# Altium PCB V2.1.PcbDoc (part 1 of 3)
Units mil, origin at the board's own origin, x right, y up, seen from the top; angles counter-clockwise.
Board outline 6653.54 x 3031.5 mil, 4 copper layers (Top Layer, 地, 电源, Bottom Layer); 355 components, 238 nets, 1139 pads, 340 vias.
Unrouted connection lines stored in the file: 1.
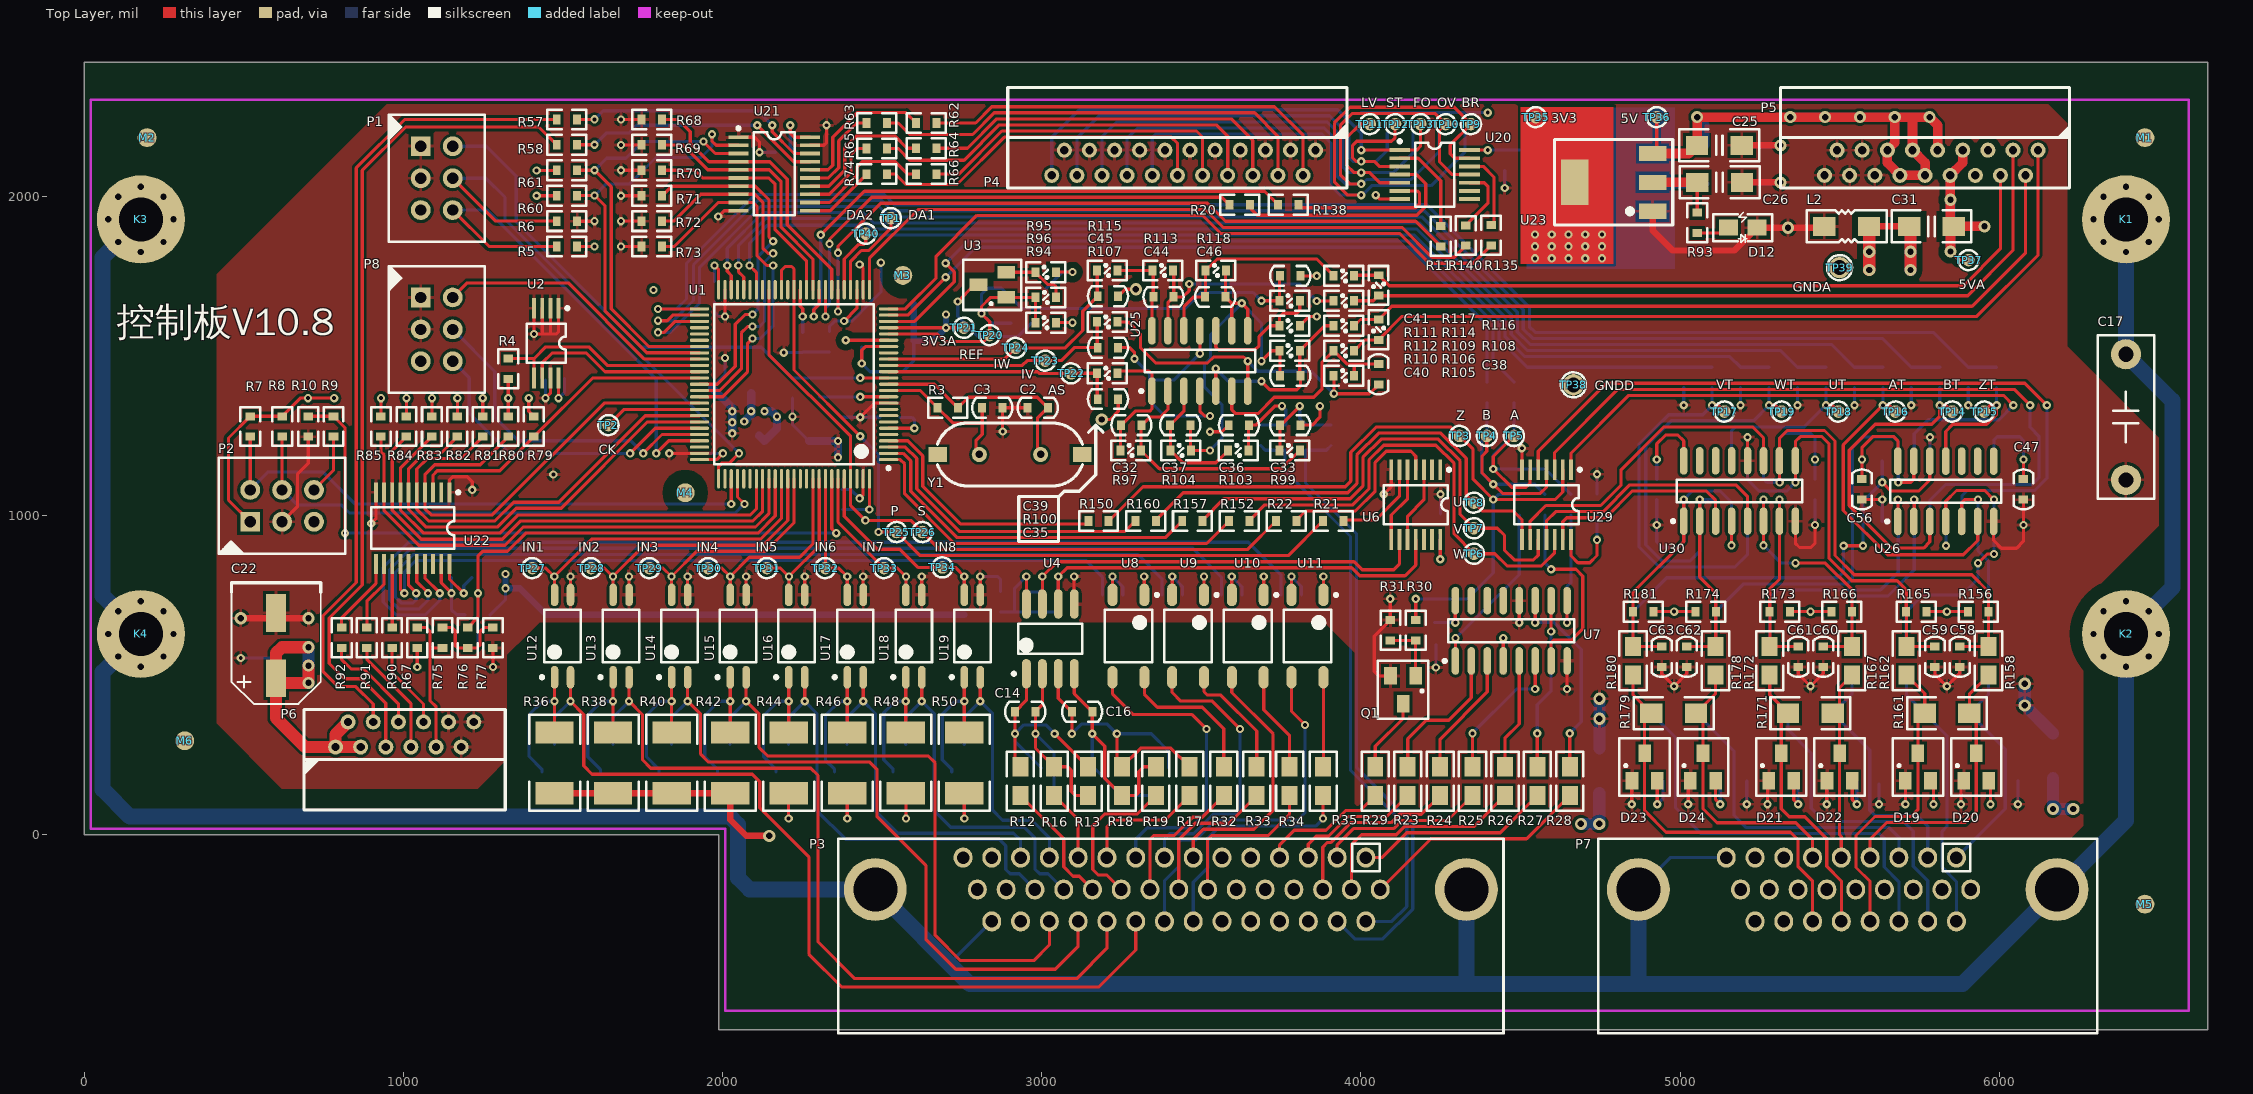
[diagram p0: Top Layer view]
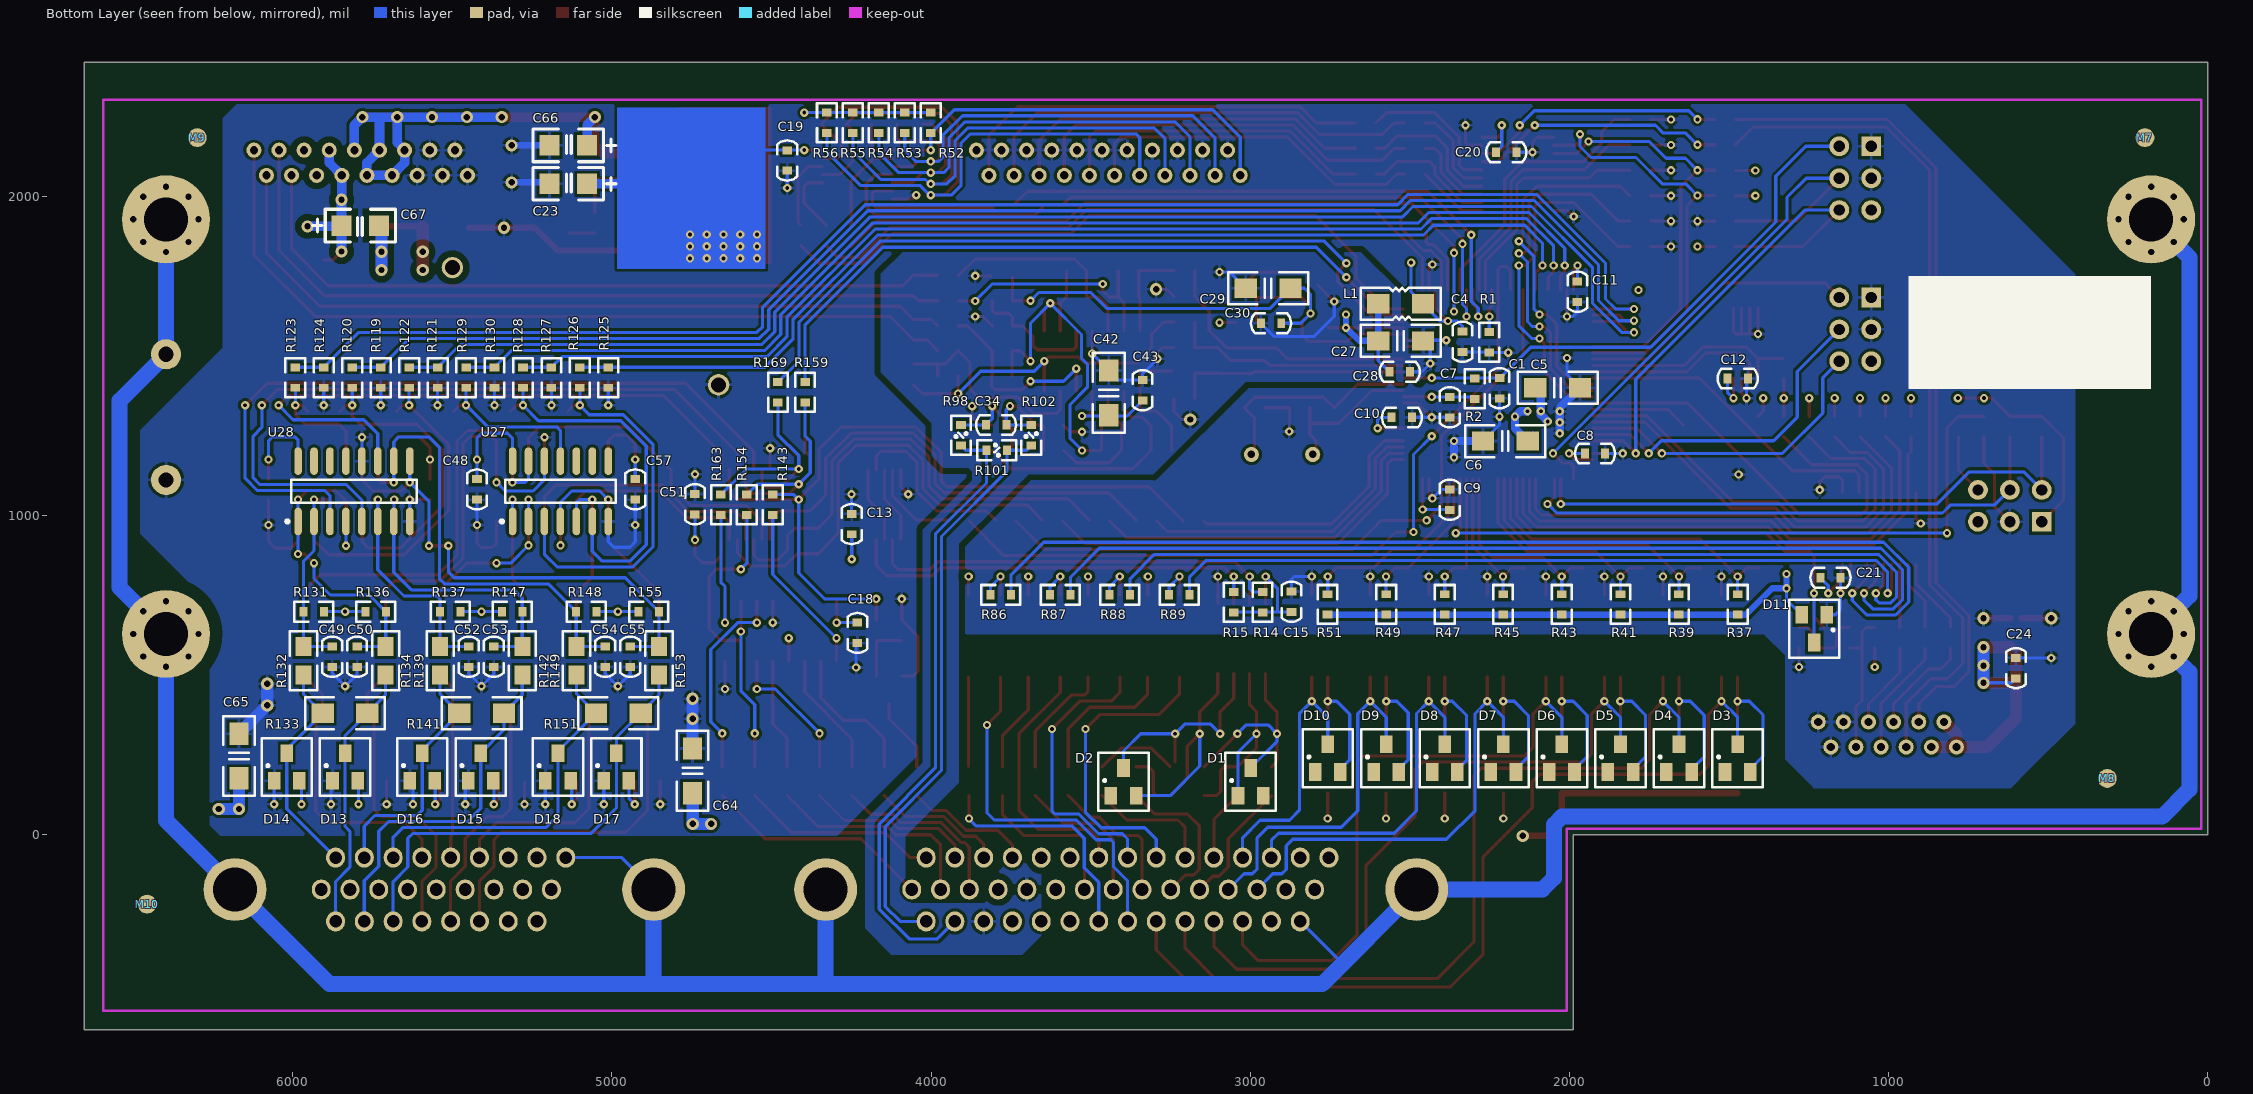
[diagram p1: Bottom Layer view, seen from below]
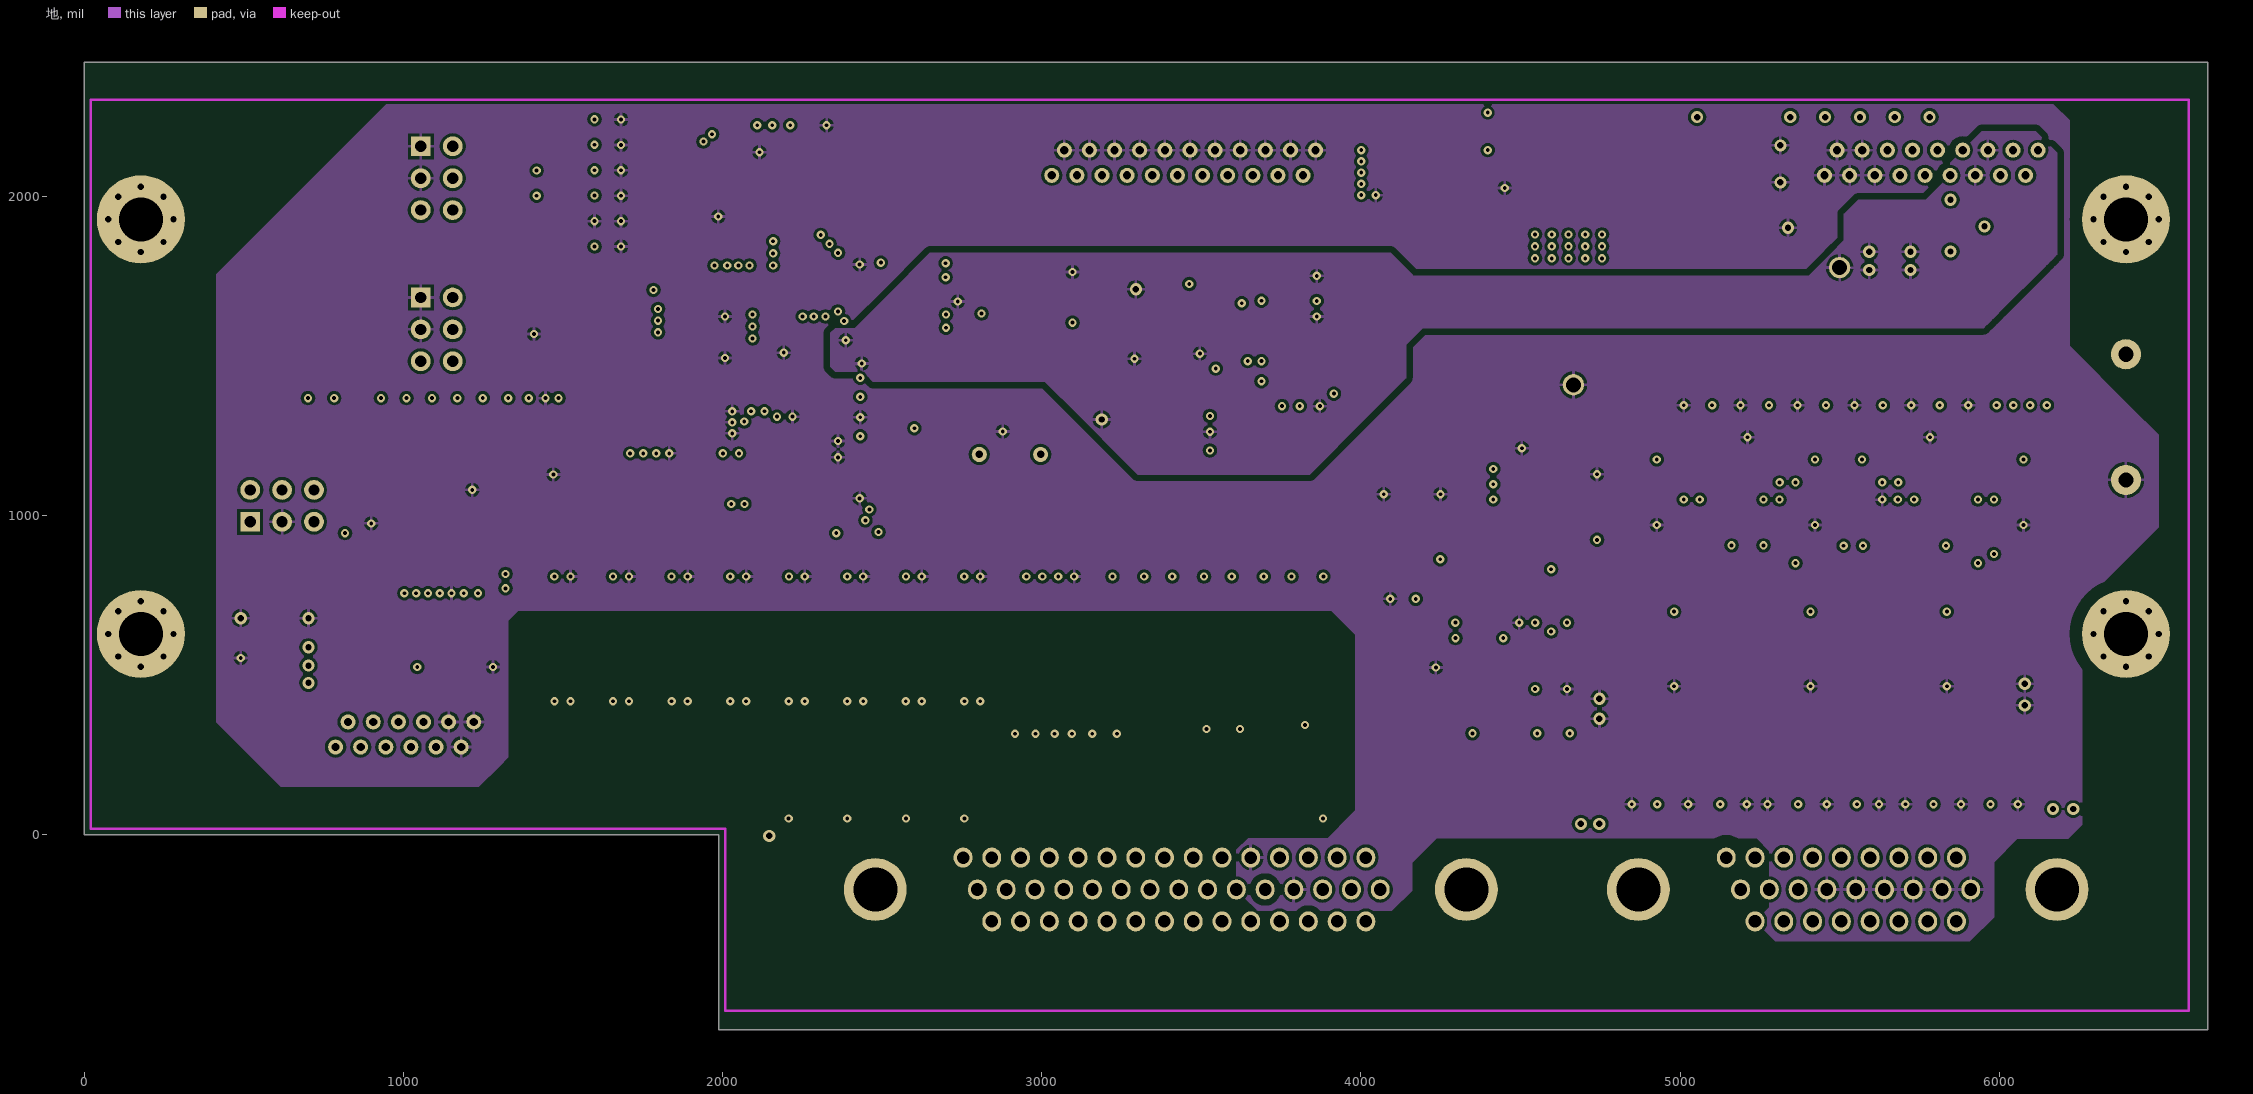
[diagram p2: 地]
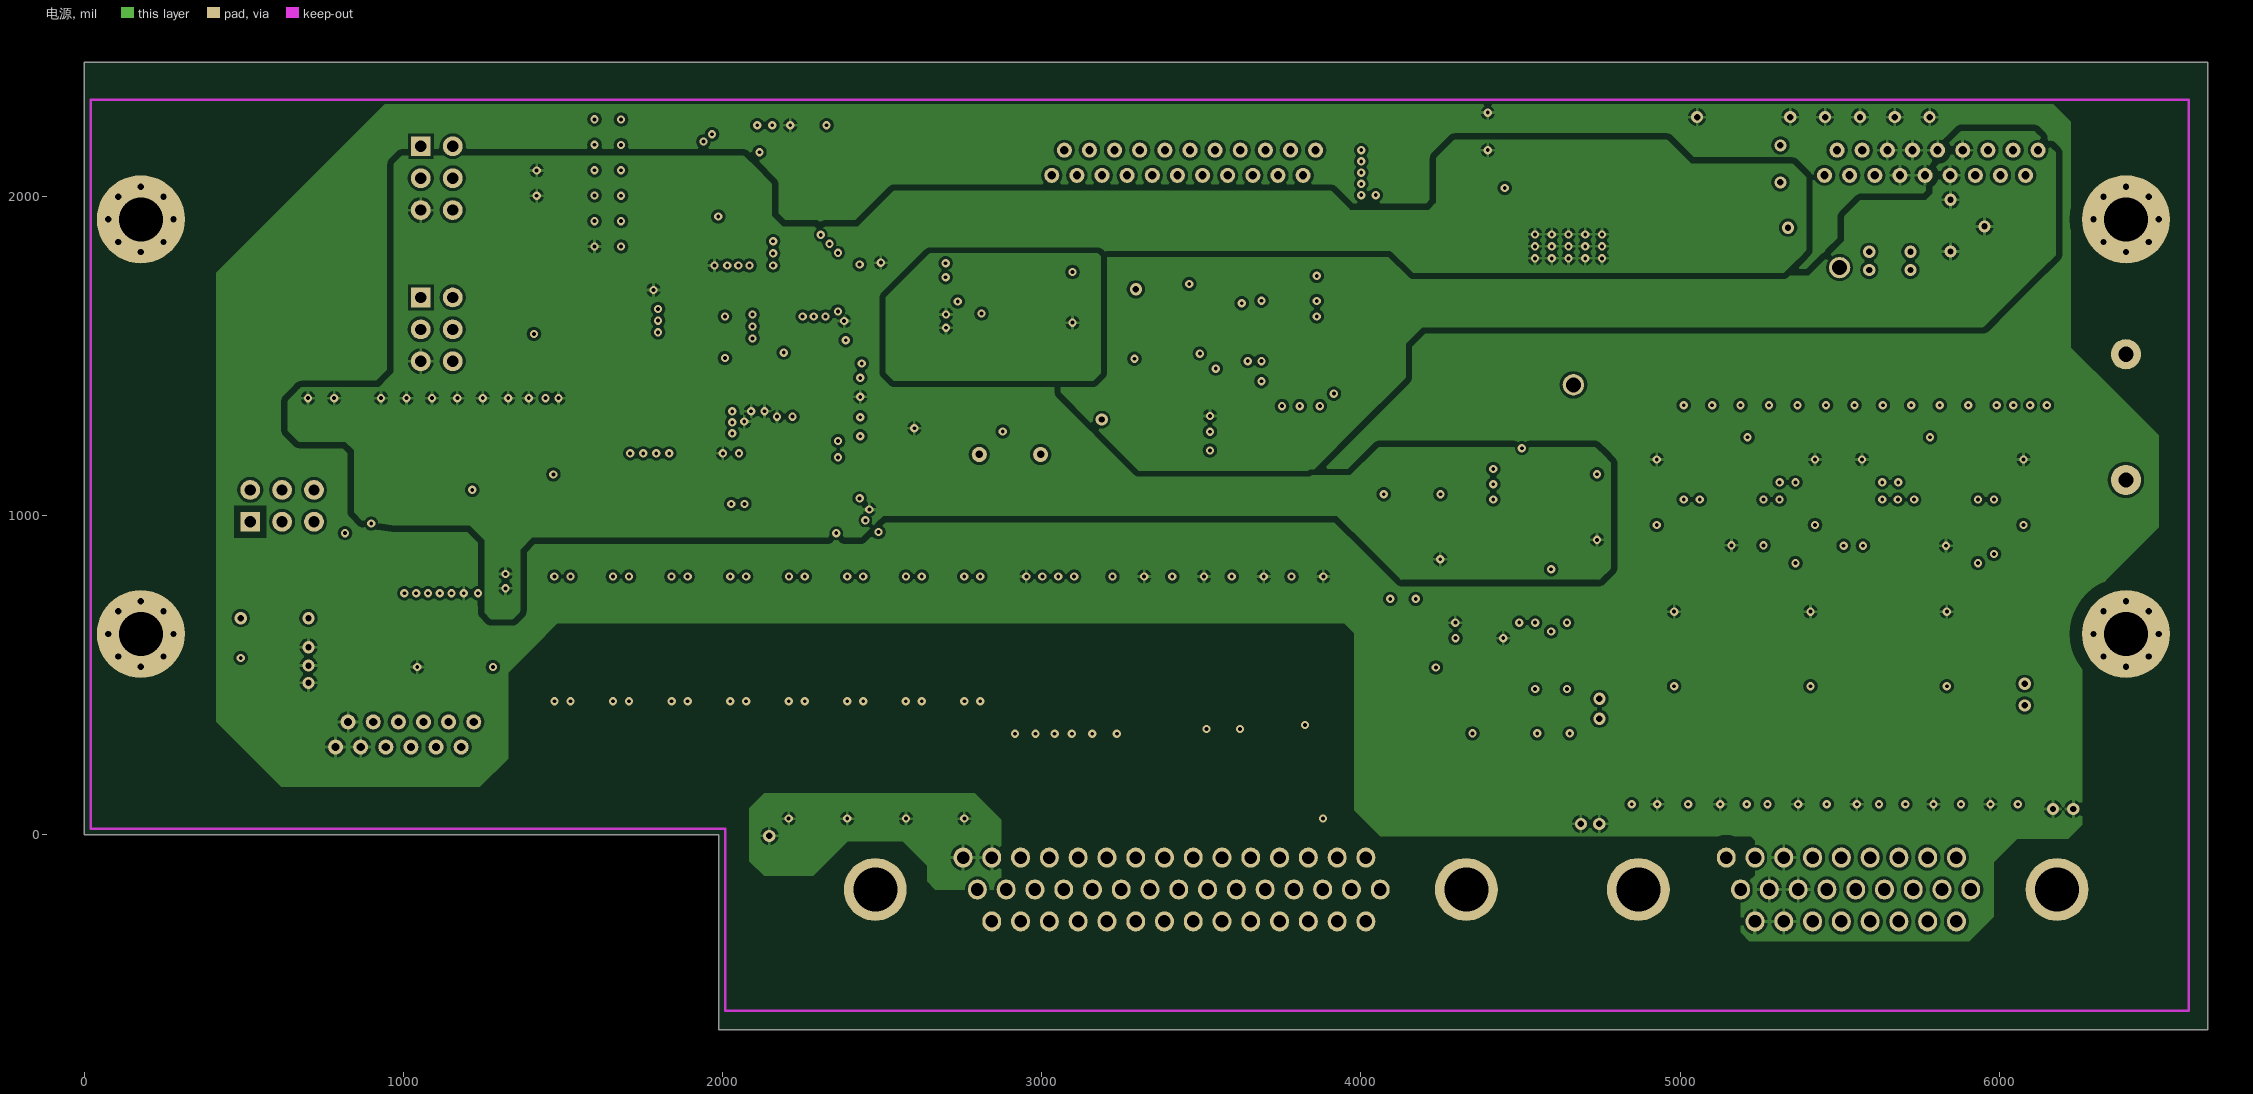
[diagram p3: 电源]

## Layer stack, top to bottom
Top Layer: signal copper 1.4
Dielectric: core 12.6, FR-4, Dk 4.8
地: signal copper 1.4
Dielectric: prepreg 12.6, FR-4, Dk 4.8
电源: signal copper 1.4
Dielectric: core 12.6, FR-4, Dk 4.8
Bottom Layer: signal copper 1.4

## Board outline
0,0 0,2421.26 6653.54,2421.26 6653.54,-610.24 1988.19,-610.24 1988.19,0 0,0

## Design rules (kind name [scope] priority, off if disabled: settings)
Clearance 5VA_5V [InNet('5VA') vs InNet('5V')] p1: gap=19.68
Clearance GNDA_GP [InNet('GNDA') vs InNet('GP')] p2: gap=19.68
Clearance 5VA_GP [InNet('5VA') vs InNet('GP')] p3: gap=19.68
Clearance 5V_3V3A [InNet('5V') vs InNet('3V3A')] p4: gap=19.68
Clearance 5VA_3V3 [InNet('5VA') vs InNet('3V3')] p5: gap=19.68
Clearance 5VA_GNDD [InNet('5VA') vs InNet('GNDD')] p6: gap=19.68
Clearance 5VA_3V3A [InNet('5VA') vs InNet('3V3A')] p7: gap=19.68
Clearance 5V_GNDA [InNet('5V') vs InNet('GNDA')] p8: gap=19.68
Clearance 5V_3V3 [InNet('5V') vs InNet('3V3')] p9: gap=19.68
Clearance 5V_5VA [InNet('5V') vs InNet('5VA')] p10: gap=19.68
Clearance 3V3_3V3A [InNet('3V3') vs InNet('3V3A')] p11: gap=19.68
Clearance 5V_GP [InNet('5V') vs InNet('GP')] p12: gap=39.37
Clearance GNDD_GNDA [InNet('GNDD') vs InNet('GNDA')] p13: gap=19.68
Clearance GNDD_GP [InNet('GNDD') vs InNet('GP')] p14: gap=39.37
Clearance COM+ [InNet('COM+') vs InNet('GP')] p15: gap=39.37
Clearance [All] p16: gap=9
ComponentClearance [All] p1: gap=7.87 collisioncheckmode=3 verticalgap=7.87 showdistances=FALSE
HoleSize [All] p1: absolutevalues=TRUE maxlimit=10000 minlimit=1 maxpercent=80.000 minpercent=20.000
MinimumSolderMaskSliver [All] p1 off: minsoldermaskwidth=10
PolygonConnect [All] p1: connectstyle=Relief reliefconductorwidth=10 reliefentries=4 polygonreliefangle="90 Angle"
RoutingLayers [All] p1: top layer_v5=TRUE mid layer 1_v5=FALSE mid layer 2_v5=FALSE bottom layer_v5=TRUE
RoutingVias [All] p1: holewidth=39.37 width=39.37 viastyle="Through Hole" minholewidth=0.04 minwidth=0.04 maxholewidth=39370.08 maxwidth=39370.08
SilkToSilkClearance [All] p1 off: silktosilkclearance=10
SilkscreenOverComponentPads [All] p1 off: minsilkscreentomaskgap=10
SolderMaskExpansion [All] p1: expansion=4
Width [All] p1: maxlimit=1000 minlimit=10 preferedwidth=10
22 further rules are at their usual default settings.

## Classes and differential pairs
component class 接口: C19 C20 C21 C22 C24 D11 P4 P5 P6 R11 R20 R52 R53 R54 R55 R56 R57 R58 R60 R61 R62 R63 R64 R65 R66 R67 R68 R69 R70 R71 R72 R73 R74 R75 R76 R77 R79 R80 R81 R82 R83 R84 R85 R86 R87 R88 R89 R90 R91 R92 R135 R138 R140 TP9 TP10 TP11 TP12 TP13 U20 U21 U22
component class 调理电路: C32 C33 C34 C35 C36 C37 C38 C39 C40 C41 C42 C43 C44 C45 C46 R97 R98 R99 R100 R101 R102 R103 R104 R105 R106 R107 R108 R109 R110 R111 R112 R113 R114 R115 R116 R117 R118 TP22 TP23 TP24 U25
component class 电源: C17 C23 C25 C26 C27 C28 C29 C30 C31 C66 C67 D12 K1 K2 K3 K4 L1 L2 M1 M2 M3 M4 M5 M6 M7 M8 M9 M10 R93 R94 R95 R96 TP20 TP21 TP35 TP36 TP37 TP38 TP39 U3 U23
component class MCU: C1 C2 C3 C4 C5 C6 C7 C8 C9 C10 C11 C12 P1 P2 P8 R1 R2 R3 R4 R5 R6 R7 R8 R9 R10 TP1 TP2 TP40 U1 U2 Y1
component class 指令: C13 C14 C15 C16 C18 D1 D2 D3 D4 D5 D6 D7 D8 D9 D10 P3 Q1 R12 R13 R14 R15 R16 R17 R18 R19 R21 R22 R23 R24 R25 R26 R27 R28 R29 R30 R31 R32 R33 R34 R35 R36 R37 R38 R39 R40 R41 R42 R43 R44 R45 R46 R47 R48 R49 R50 R51 TP25 TP26 TP27 TP28 TP29 TP30 TP31 TP32 TP33 TP34 U4 U6 U7 U8 U9 U10 U11 U12 U13 U14 U15 U16 U17 U18 U19
component class 编码器: C47 C48 C49 C50 C51 C52 C53 C54 C55 C56 C57 C58 C59 C60 C61 C62 C63 C64 C65 D13 D14 D15 D16 D17 D18 D19 D20 D21 D22 D23 D24 P7 R119 R120 R121 R122 R123 R124 R125 R126 R127 R128 R129 R130 R131 R132 R133 R134 R136 R137 R139 R141 R142 R143 R147 R148 R149 R150 R151 R152 R153 R154 R155 R156 R157 R158 R159 R160 R161 R162 R163 R165 R166 R167 R169 R171 R172 R173 R174 R178 R179 R180 R181 TP3 TP4 TP5 TP6 TP7 TP8 TP14 TP15 TP16 TP17 TP18 TP19 U26 U27 U28 U29 U30

## Components (designator, comment, footprint, x,y, rotation, side; value= is the part's Value field where it differs from the comment)
C1 "0.1uF" "C SMD 0603" 2219,1432.16 r270 bottom
C2 "10pF" "C SMD 0603" 3019.5,1338.81 r180 top
C3 "10pF" "C SMD 0603" 2813.42,1338.81 r0 top
C4 "0.1uF" "C SMD 0603" 2335,1513.16 r90 bottom
C5 "10uF" "C SMD 1206" 2107,1401.31 r180 bottom
C6 "10uF" "C SMD 1206" 2131,1234.31 r0 bottom
C7 "0.1uF" "C SMD 0603" 2375,1372.31 r270 bottom
C8 "0.1uF" "C SMD 0603" 1952,1195.31 r180 bottom
C9 "0.1uF" "C SMD 0603" 2375,1018.31 r90 bottom
C10 "0.1uF" "C SMD 0603" 2557,1308.31 r180 bottom
C11 "0.1uF" "C SMD 0603" 1975,1734.31 r270 bottom
C12 "0.1uF" "C SMD 0603" 1505,1430.31 r180 bottom
C13 "0.1uF" "C SMD 0603" 4249,942.31 r90 bottom
C14 "10pF" "C SMD 0603" 2980.59,386.39 r180 top
C15 "0.1uF" "C SMD 0603" 2871,763.16 r270 bottom
C16 "10pF" "C SMD 0603" 3158.59,386.39 r180 top
C17 "0.1uF 安规" "安规电容 10mm间距" 6397,1506.31 r270 top
C18 "0.1uF" "C SMD 0603" 4231,665.23 r270 bottom
C19 "0.1uF" "C SMD 0603" 4451,2145.31 r270 bottom
C20 "0.1uF" "C SMD 0603" 2230,2139.31 r180 bottom
C21 "0.1uF" "C SMD 0603" 1214,806.31 r180 bottom
C22 "100uF 16V ALC" D6.3ALC 601.09,490.89 r180 top
C23 "10uF 16V TAC" 3216TAC 5077.74,2040.31 r0 bottom
C24 "0.1uF" "C SMD 0603" 601.09,490.89 r90 bottom
C25 "10uF" "C SMD 1206" 5193.09,2160.89 r180 top
C26 "10uF" "C SMD 1206" 5194.09,2044.89 r180 top
C27 "10uF" "C SMD 1206" 2459,1548.31 r0 bottom
C28 "0.01uF" "C SMD 0603" 2500,1451.31 r0 bottom
C29 "10uF" "C SMD 1206" 3014,1713.31 r180 bottom
C30 "0.01uF" "C SMD 0603" 2967,1603.31 r180 bottom
C31 "10uF" "C SMD 1206" 5718,1906.83 r0 top
C32 "1nF" "C SMD 0603" 3313,1284.31 r180 top
C33 "1nF" "C SMD 0603" 3810.5,1284.31 r180 top
C34 "1nF" "C SMD 0603" 3828.5,1284.81 r180 bottom
C35 "1nF" "C SMD 0603" 3239.57,1365.93 r180 top
C36 "1nF" "C SMD 0603" 3586.05,1284.31 r0 top
C37 "1nF" "C SMD 0603" 3466.02,1284.31 r180 top
C38 "1nF" "C SMD 0603" 4055.5,1475.31 r270 top
C39 "1nF" "C SMD 0603" 3239.57,1527.08 r180 top
C40 "1nF" "C SMD 0603" 3746.5,1439.2 r0 top
C41 "0.1uF" "C SMD 0603" 3810.5,1751.81 r180 top
C42 "10uF" "C SMD 1206" 3443.5,1455.31 r270 bottom
C43 "0.1uF" "C SMD 0603" 3337.5,1425.31 r270 bottom
C44 "1nF" "C SMD 0603" 3413.57,1685.93 r180 top
C45 "1nF" "C SMD 0603" 3239.57,1688.24 r180 top
C46 "1nF" "C SMD 0603" 3575.57,1685.93 r180 top
C47 "0.1uF" "C SMD 0603" 6076,1114.81 r270 top
C48 "0.1uF" "C SMD 0603" 5423,1114.81 r270 bottom
C49 "1nF" "C SMD 0603" 5876.59,526.23 r90 bottom
C50 "1nF" "C SMD 0603" 5798.59,590.23 r270 bottom
C51 "0.1uF" "C SMD 0603" 4740,1004.31 r90 bottom
C52 "1nF" "C SMD 0603" 5448.59,526.23 r90 bottom
C53 "1nF" "C SMD 0603" 5370.59,590.23 r270 bottom
C54 "1nF" "C SMD 0603" 5021.09,526.23 r90 bottom
C55 "1nF" "C SMD 0603" 4942.59,590.23 r270 bottom
C56 "0.1uF" "C SMD 0603" 5570,1114.81 r270 top
C57 "0.1uF" "C SMD 0603" 4927,1114.81 r270 bottom
C58 "1nF" "C SMD 0603" 5876.59,526.23 r90 top
C59 "1nF" "C SMD 0603" 5798.59,590.23 r270 top
C60 "1nF" "C SMD 0603" 5448.59,526.23 r90 top
C61 "1nF" "C SMD 0603" 5370.59,590.23 r270 top
C62 "1nF" "C SMD 0603" 5021.09,526.23 r90 top
C63 "1nF" "C SMD 0603" 4942.59,590.23 r270 top
C64 "10uF" "C SMD 1206" 4747.59,131.15 r90 bottom
C65 "10uF" "C SMD 1206" 6168.59,177.65 r90 bottom
C66 "10uF 16V TAC" 3216TAC 5077.74,2160.81 r0 bottom
C67 "10uF 16V TAC" 3216TAC 5847.5,1909.31 r180 bottom
D1 "BAV99" SOT23 3038.59,123.39 r180 bottom
D2 "BAV99" SOT23 3436.59,123.39 r180 bottom
D3 "BAV99" SOT23 1512.59,197.39 r180 bottom
D4 "BAV99" SOT23 1696.02,197.39 r180 bottom
D5 "BAV99" SOT23 1879.45,197.39 r180 bottom
D6 "BAV99" SOT23 2062.88,197.39 r180 bottom
D7 "BAV99" SOT23 2246.31,197.39 r180 bottom
D8 "BAV99" SOT23 2429.74,197.39 r180 bottom
D9 "BAV99" SOT23 2613.17,197.39 r180 bottom
D10 "BAV99" SOT23 2796.59,197.39 r180 bottom
D11 "BAV99" SOT23 1193.5,689.81 r0 bottom
D12 "GREEN" "LED SMD 0805" 5151.59,1902.89 r0 top
D13 "BAV99" SOT23 5875.59,169.89 r180 bottom
D14 "BAV99" SOT23 6058.59,169.89 r180 bottom
D15 "BAV99" SOT23 5450.59,169.89 r180 bottom
D16 "BAV99" SOT23 5633.59,169.89 r180 bottom
D17 "BAV99" SOT23 5025.59,169.89 r180 bottom
D18 "BAV99" SOT23 5208.59,169.89 r180 bottom
D19 "BAV99" SOT23 5706.09,169.89 r0 top
D20 "BAV99" SOT23 5888.59,169.89 r0 top
D21 "BAV99" SOT23 5277.84,169.89 r0 top
D22 "BAV99" SOT23 5460.59,169.89 r0 top
D23 "BAV99" SOT23 4849.59,169.89 r0 top
D24 "BAV99" SOT23 5032.59,169.89 r0 top
K1 "定位孔" 定位孔 6397.64,1929.13 r0 top
K2 "定位孔" 定位孔 6397.64,629.92 r0 top
K3 "定位孔" 定位孔 177.17,1929.13 r0 top
K4 "定位孔" 定位孔 177.17,629.92 r0 top
L1 "磁珠" "L SMD 1206" 2459,1664.31 r0 bottom
L2 "磁珠" "L SMD 1206" 5592,1906.83 r180 top
M1 "MARK点 TOP" "MARK点 TOP"#1 6456.69,2185.04 r0 top
M2 "MARK点 TOP" "MARK点 TOP"#1 196.85,2185.04 r0 top
M3 "MARK点 TOP" "MARK点 TOP"#1 2565,1753.31 r0 top
M4 "MARK点 TOP" "MARK点 TOP"#1 1883,1072.31 r0 top
M5 "MARK点 TOP" "MARK点 TOP"#1 6456.69,-216.54 r0 top
M6 "MARK点 TOP" "MARK点 TOP"#1 314.96,295.28 r0 top
M7 "MARK点 TOP" "MARK点 TOP"#2 196.85,2185.04 r180 bottom
M8 "MARK点 TOP" "MARK点 TOP"#2 314.96,177.17 r180 bottom
M9 "MARK点 TOP" "MARK点 TOP"#2 6299.21,2185.04 r180 bottom
M10 "MARK点 TOP" "MARK点 TOP"#2 6456.69,-216.54 r180 bottom
P1 "DEBUG1" "2.54 针 3*2" 1054.5,2157.89 r270 top
P2 "FLASH1" "2.54 针 3*2" 520,981.31 r0 top
P3 "DB44_FEMALE" DB44_FEMALE_RA 4015.71,-70.79 r0 top locked
P4 "PWM INTERFACE" FFC_1.0mm_22pin_弯 3858.27,2145.67 r180 top
P5 "POWER INTERFACE" FFC_1.0mm_18pin_弯 6122.05,2145.67 r180 top
P6 "DISPLAY INTERFACE" FFC_1.0mm_12pin_弯 787.4,275.59 r0 top
P7 "DB26_FEMALE" DB26_FEMALE_RA 5866.11,-70.79 r0 top
P8 "USB" "2.54 针 3*2" 1054.5,1684.31 r270 top
Q1 "2N7002" SOT23 4171.59,498.39 r180 top
R1 "10K" "R SMD 0603" 2251,1575.31 r270 bottom
R2 "10K" "R SMD 0603" 2297,1430.31 r270 bottom
R3 "10M" "R SMD 0603" 2737.5,1338.81 r180 top
R4 "10K" "R SMD 0603" 1328.88,1492.52 r270 top
R5 "10K" "R SMD 0603" 1480.5,1843.89 r0 top
R6 "10K" "R SMD 0603" 1544.5,1923.49 r180 top
R7 "10K" "R SMD 0603" 520,1247.89 r90 top
R8 "10K" "R SMD 0603" 620,1247.89 r90 top
R9 "1K" "R SMD 0603" 781,1311.89 r270 top
R10 "10K" "R SMD 0603" 702,1311.89 r270 top
R11 "100" "R SMD 0603" 4250,1908.31 r270 top
R12 "100 0805" "R SMD 0805" 2933.09,213.65 r270 top
R13 "10K 0805" "R SMD 0805" 3145.29,123.65 r90 top
R14 "10K" "R SMD 0603" 2961.55,761.31 r270 bottom
R15 "10K" "R SMD 0603" 3052.09,761.31 r270 bottom
R16 "100 0805" "R SMD 0805" 3039.19,213.65 r270 top
R17 "100 0805" "R SMD 0805" 3463.59,213.65 r270 top
R18 "10K 0805" "R SMD 0805" 3251.39,123.65 r90 top
R19 "100 0805" "R SMD 0805" 3357.49,213.65 r270 top
R20 "100" "R SMD 0603" 3652,1974.31 r180 top
R21 "100" "R SMD 0603" 3881,983.81 r0 top
R22 "100" "R SMD 0603" 3734.12,983.81 r0 top
R23 "6R8 0805" "R SMD 0805" 4146.68,213.65 r270 top
R24 "6R8 0805" "R SMD 0805" 4248.26,213.65 r270 top
R25 "6R8 0805" "R SMD 0805" 4349.84,213.65 r270 top
R26 "6R8 0805" "R SMD 0805" 4451.43,213.65 r270 top
R27 "6R8 0805" "R SMD 0805" 4553.01,213.65 r270 top
R28 "6R8 0805" "R SMD 0805" 4654.59,213.65 r270 top
R29 "6R8 0805" "R SMD 0805" 4045.09,123.65 r90 top
R30 "390" "R SMD 0603" 4171.59,609.39 r90 top
R31 "10K" "R SMD 0603" 4092.59,609.39 r90 top
R32 "6R8 0805" "R SMD 0805" 3570.59,213.65 r270 top
R33 "6R8 0805" "R SMD 0805" 3673.59,213.65 r270 top
R34 "6R8 0805" "R SMD 0805" 3776.59,213.65 r270 top
R35 "6R8 0805" "R SMD 0805" 3881.59,213.65 r270 top
R36 "4.7K 1812" "R SMD 1812" 1473.59,321.15 r270 top
R37 "10K" "R SMD 0603" 1473,690.31 r90 bottom
R38 "4.7K 1812" "R SMD 1812" 1657.02,321.15 r270 top
R39 "10K" "R SMD 0603" 1657,690.31 r90 bottom
R40 "4.7K 1812" "R SMD 1812" 1840.45,321.15 r270 top
R41 "10K" "R SMD 0603" 1840,690.31 r90 bottom
R42 "4.7K 1812" "R SMD 1812" 2023.88,321.15 r270 top
R43 "10K" "R SMD 0603" 2024,690.31 r90 bottom
R44 "4.7K 1812" "R SMD 1812" 2207.31,321.15 r270 top
R45 "10K" "R SMD 0603" 2208,690.31 r90 bottom
R46 "4.7K 1812" "R SMD 1812" 2390.74,321.15 r270 top
R47 "10K" "R SMD 0603" 2391,690.31 r90 bottom
R48 "4.7K 1812" "R SMD 1812" 2574.17,321.15 r270 top
R49 "10K" "R SMD 0603" 2574,690.31 r90 bottom
R50 "4.7K 1812" "R SMD 1812" 2757.59,321.15 r270 top
R51 "10K" "R SMD 0603" 2758,690.31 r90 bottom
R52 "10K" "R SMD 0603" 4001,2199.31 r90 bottom
R53 "10K" "R SMD 0603" 4082.4,2199.31 r90 bottom
R54 "10K" "R SMD 0603" 4163.8,2199.31 r90 bottom
R55 "10K" "R SMD 0603" 4245.2,2199.31 r90 bottom
R56 "10K" "R SMD 0603" 4326.6,2199.31 r90 bottom
R57 "250" "R SMD 0603" 1544.5,2241.89 r180 top
R58 "250" "R SMD 0603" 1544.5,2162.29 r180 top
R60 "10K" "R SMD 0603" 1480.5,2003.09 r0 top
R61 "10K" "R SMD 0603" 1480.5,2082.69 r0 top
R62 "250" "R SMD 0603" 2606.59,2230.89 r0 top
R63 "250" "R SMD 0603" 2451.59,2230.89 r0 top
R64 "250" "R SMD 0603" 2606.59,2151.89 r0 top
R65 "250" "R SMD 0603" 2451.59,2150.89 r0 top
R66 "250" "R SMD 0603" 2606.59,2070.89 r0 top
R67 "10K" "R SMD 0603" 1043.5,585.81 r90 top
R68 "10K" "R SMD 0603" 1810.59,2241.89 r180 top
R69 "10K" "R SMD 0603" 1810.59,2162.29 r180 top
R70 "10K" "R SMD 0603" 1810.59,2082.69 r180 top
R71 "10K" "R SMD 0603" 1810.59,2003.09 r180 top
R72 "10K" "R SMD 0603" 1810.59,1923.49 r180 top
R73 "10K" "R SMD 0603" 1810.59,1843.89 r180 top
R74 "250" "R SMD 0603" 2451.59,2070.89 r0 top
R75 "1K" "R SMD 0603" 1122.5,585.81 r90 top
R76 "1K" "R SMD 0603" 1201.5,649.81 r270 top
R77 "2K" "R SMD 0603" 1280.5,585.81 r90 top
R79 "10K" "R SMD 0603" 1408.74,1247.89 r90 top
R80 "10K" "R SMD 0603" 1328.88,1247.89 r90 top
R81 "10K" "R SMD 0603" 1249.02,1247.89 r90 top
R82 "10K" "R SMD 0603" 1169.17,1247.89 r90 top
R83 "10K" "R SMD 0603" 1089.31,1247.89 r90 top
R84 "10K" "R SMD 0603" 1009.45,1247.89 r90 top
R85 "10K" "R SMD 0603" 929.59,1247.89 r90 top
R86 "390" "R SMD 0603" 3750,752.31 r0 bottom
R87 "390" "R SMD 0603" 3563.33,752.31 r0 bottom
R88 "390" "R SMD 0603" 3376.67,752.31 r0 bottom
R89 "390" "R SMD 0603" 3190,752.31 r0 bottom
R90 "390" "R SMD 0603" 964.5,649.81 r270 top
R91 "390" "R SMD 0603" 885.5,649.81 r270 top
R92 "390" "R SMD 0603" 806.5,649.81 r270 top
R93 "1K" "R SMD 0603" 5054,1949.83 r270 top
R94 "1% 13" "R SMD 0603 1%" 3044.5,1605.31 r180 top
R95 "1% 3160" "R SMD 0603 1%" 3044.5,1763.31 r180 top
R96 "1% 634" "R SMD 0603 1%" 2980.5,1684.31 r0 top
R97 "1% 6K8" "R SMD 0603 1%" 3311.16,1204.81 r180 top
R98 "1% 20K" "R SMD 0603 1%" 3906.5,1220.31 r90 bottom
R99 "1% 30K" "R SMD 0603 1%" 3744.66,1204.81 r0 top
R100 "1% 100" "R SMD 0603 1%" 3237.73,1446.51 r180 top
R101 "1% 10K" "R SMD 0603 1%" 3826.66,1205.81 r180 bottom
R102 "1% 20K" "R SMD 0603 1%" 3686.5,1220.31 r90 bottom
R103 "1% 30K" "R SMD 0603 1%" 3648.21,1204.81 r180 top
R104 "1% 6K8" "R SMD 0603 1%" 3467.86,1204.81 r180 top
R105 "1% 6.8K" "R SMD 0603 1%" 3915,1439.2 r0 top
R106 "1% 10K" "R SMD 0603 1%" 3915,1517.35 r0 top
R107 "1% 100" "R SMD 0603 1%" 3237.73,1607.66 r180 top
R108 "1% 4.7K" "R SMD 0603 1%" 4055.5,1551.31 r90 top
R109 "1% 10K" "R SMD 0603 1%" 3915,1595.51 r0 top
R110 "1% 6.8K" "R SMD 0603 1%" 3808.66,1517.35 r180 top
R111 "1% 10K" "R SMD 0603 1%" 3808.66,1673.66 r180 top
R112 "1% 10K" "R SMD 0603 1%" 3808.66,1595.51 r180 top
R113 "1% 6.8K" "R SMD 0603 1%" 3347.73,1768.81 r0 top
R114 "1% 10K" "R SMD 0603 1%" 3915,1673.66 r0 top
R115 "1% 100" "R SMD 0603 1%" 3237.73,1768.81 r180 top
R116 "1% 4.7K" "R SMD 0603 1%" 4055.5,1689.81 r90 top
R117 "1% 10K" "R SMD 0603 1%" 3915,1751.81 r0 top
R118 "1% 6.8K" "R SMD 0603 1%" 3513.41,1768.81 r0 top
R119 "2K" "R SMD 0603" 5724.56,1465.31 r270 bottom
R120 "1K" "R SMD 0603" 5813.7,1401.31 r90 bottom
R121 "2K" "R SMD 0603" 5546.29,1465.31 r270 bottom
R122 "1K" "R SMD 0603" 5635.43,1401.31 r90 bottom
R123 "1K" "R SMD 0603" 5991.96,1401.31 r90 bottom
R124 "2K" "R SMD 0603" 5902.83,1465.31 r270 bottom
R125 "2K" "R SMD 0603" 5011.49,1465.31 r270 bottom
R126 "1K" "R SMD 0603" 5100.63,1401.31 r90 bottom
R127 "2K" "R SMD 0603" 5189.76,1465.31 r270 bottom
R128 "1K" "R SMD 0603" 5278.89,1401.31 r90 bottom
R129 "1K" "R SMD 0603" 5457.16,1401.31 r90 bottom
R130 "2K" "R SMD 0603" 5368.03,1465.31 r270 bottom
R131 "10K" "R SMD 0603" 5966.59,699.89 r180 bottom
R132 "100 0805" "R SMD 0805" 5966.59,500.89 r90 bottom
R133 "300 1206" "R SMD 1206" 5906.72,381.39 r180 bottom
R134 "100 0805" "R SMD 0805" 5709.22,500.89 r90 bottom
R135 "100" "R SMD 0603" 4408,1847.31 r90 top
R136 "10K" "R SMD 0603" 5708.59,699.89 r0 bottom
R137 "10K" "R SMD 0603" 5475.09,699.89 r0 bottom
R138 "100" "R SMD 0603" 3805,1974.31 r180 top
R139 "100 0805" "R SMD 0805" 5538.59,500.89 r90 bottom
R140 "100" "R SMD 0603" 4329,1846.31 r90 top
R141 "300 1206" "R SMD 1206" 5478.47,381.39 r180 bottom
R142 "100 0805" "R SMD 0805" 5280.97,500.89 r90 bottom
R143 "100" "R SMD 0603" 4496,1002.47 r90 bottom
R147 "10K" "R SMD 0603" 5281.09,699.89 r0 bottom
R148 "10K" "R SMD 0603" 5048.09,699.89 r0 bottom
R149 "100 0805" "R SMD 0805" 5111.2,500.89 r90 bottom
R150 "100" "R SMD 0603" 3146,983.81 r0 top
R151 "300 1206" "R SMD 1206" 5050.22,381.39 r180 bottom
R152 "100" "R SMD 0603" 3651.25,983.81 r180 top
R153 "100 0805" "R SMD 0805" 4852.72,500.89 r90 bottom
R154 "100" "R SMD 0603" 4577.33,1002.47 r90 bottom
R155 "10K" "R SMD 0603" 4852.59,699.89 r0 bottom
R156 "10K" "R SMD 0603" 5902.59,699.89 r0 top
R157 "100" "R SMD 0603" 3504.38,983.81 r180 top
R158 "100 0805" "R SMD 0805" 5966.59,500.89 r90 top
R159 "100" "R SMD 0603" 4395,1418.81 r270 bottom
R160 "100" "R SMD 0603" 3357.5,983.81 r180 top
R161 "300 1206" "R SMD 1206" 5906.72,381.39 r180 top
R162 "100 0805" "R SMD 0805" 5709.22,500.89 r90 top
R163 "100" "R SMD 0603" 4658.67,1002.47 r90 bottom
R165 "10K" "R SMD 0603" 5708.59,699.89 r0 top
R166 "10K" "R SMD 0603" 5475.09,699.89 r0 top
R167 "100 0805" "R SMD 0805" 5538.59,500.89 r90 top
R169 "100" "R SMD 0603" 4480,1418.81 r270 bottom
R171 "300 1206" "R SMD 1206" 5478.47,381.39 r180 top
R172 "100 0805" "R SMD 0805" 5280.97,500.89 r90 top
R173 "10K" "R SMD 0603" 5281.09,699.89 r0 top
R174 "10K" "R SMD 0603" 5048.09,699.89 r0 top
R178 "100 0805" "R SMD 0805" 5111.2,500.89 r90 top
R179 "300 1206" "R SMD 1206" 5050.22,381.39 r180 top
R180 "100 0805" "R SMD 0805" 4852.72,500.89 r90 top
R181 "10K" "R SMD 0603" 4852.59,699.89 r0 top
TP1 "DA1" 测点 2527.5,1933 r0 top
TP2 "CK" 测点 1642.5,1284.31 r90 top
TP3 "Z" 测点 4309.5,1250.31 r180 top
TP4 "B" 测点 4394.5,1250.31 r90 top
TP5 "A" 测点 4479.5,1250.31 r90 top
TP6 "W" 测点 4354,881.31 r90 top
TP7 "V" 测点 4354,961.31 r90 top
TP8 "U" 测点 4354,1041.31 r90 top
TP9 "BR" 测点 4345,2227.31 r90 top
TP10 "OV" 测点 4265.75,2227.31 r90 top
TP11 "LV" 测点 4028,2227.31 r90 top
TP12 "ST" 测点 4107.25,2227.31 r90 top
TP13 "FO" 测点 4186.5,2227.31 r90 top
TP14 "BT" 测点 5853,1326.81 r90 top
TP15 "ZT" 测点 5953,1326.81 r90 top
TP16 "AT" 测点 5675,1326.81 r90 top
TP17 "VT" 测点 5139,1326.81 r90 top
TP18 "UT" 测点 5496,1326.81 r90 top
TP19 "WT" 测点 5318,1326.81 r90 top
TP20 "REF" 测点 2837,1566.31 r90 top
TP21 "3V3A" 测点 2756,1589.48 r90 top
TP22 "AS" 测点 3092,1446.31 r90 top
TP23 "IV" 测点 3011.04,1486.31 r90 top
TP24 "IW" 测点 2918.33,1526.31 r90 top
TP25 "P" 测点 2545,949.31 r90 top
TP26 "S" 测点 2626,949.31 r90 top
TP27 "IN1" 测点 1404,836.31 r90 top
TP28 "IN2" 测点 1588,836.31 r90 top
TP29 "IN3" 测点 1771,836.31 r270 top
TP30 "IN4" 测点 1955,836.31 r270 top
TP31 "IN5" 测点 2139,836.31 r270 top
TP32 "IN6" 测点 2322,836.31 r270 top
TP33 "IN7" 测点 2506,836.31 r270 top
TP34 "IN8" 测点 2689,838.31 r270 top
TP35 "3V3" 测点 4548,2249.31 r90 top
TP36 "5V" 测点 4927,2249.31 r90 top
TP37 "5VA" 测点 5904,1801.31 r90 top
TP38 "GNDD" "测点 地" 4666,1410.5 r90 top
TP39 "GNDA" "测点 地" 5500,1777.81 r90 top
TP40 "DA2" 测点 2448.5,1884 r90 top
U1 "STM32F103VET6" LQFP100_L 2224,1412.31 r180 top locked
U2 "AT24C64C" TSSOP8 1447.74,1541.31 r180 top
U3 "TL431" SOT23 2888.5,1684.31 r90 top
U4 "HCPL-2631" HCPL062N 2952.09,505.22 r90 top
U6 "74LVC14" TSSOP14 4172,1035.27 r180 top
U7 "AM26LS31CD" NSO16_N 4471.09,639.89 r90 top
U8 "TLP127" TLP181 3321.59,752.27 r180 top
U9 "TLP127" TLP181 3508.59,752.27 r180 top
U10 "TLP127" TLP181 3695.59,752.27 r180 top
U11 "TLP127" TLP181 3882.59,752.27 r180 top
U12 "TLP281" TLP281 1473.59,494.39 r0 top
U13 "TLP281" TLP281 1657.02,494.39 r0 top
U14 "TLP281" TLP281 1840.45,494.39 r0 top
U15 "TLP281" TLP281 2023.88,494.39 r0 top
U16 "TLP281" TLP281 2207.31,494.39 r0 top
U17 "TLP281" TLP281 2390.74,494.39 r0 top
U18 "TLP281" TLP281 2574.17,494.39 r0 top
U19 "TLP281" TLP281 2757.59,494.39 r0 top
U20 "74LVC14" TSSOP14 4231,2069.31 r270 top
U21 "SN74HC541DW" TSSOP20 2162,2071.31 r270 top
U22 "SN74HC541DW" TSSOP20 1029,961.31 r180 top
U23 "LM1117" SOT223 4914,1954.31 r90 top
U25 "TLV2374" NSO14_N 3495.5,1485.31 r90 top
U26 "74HC86" NSO14_N 5832.59,1076.89 r90 top
U27 "74HC86" NSO14_N 5161.59,1076.89 r90 bottom
U28 "AM26LS32ACD" NSO16_N 5808.59,1076.89 r90 bottom
U29 "74LVC14" TSSOP14 4581.59,1035.27 r180 top
U30 "AM26LS32ACD" NSO16_N 5186.59,1077.89 r90 top
Y1 "XTAL" XTAL 2804.4,1192.31 r270 top

## Footprints (in the part's own frame and the unit in brackets; to place one, negate y for a bottom-side part, rotate by r counter-clockwise, add the part's x,y. Pads: shape width x height; smd on the part's side, far side on the other; paste and mask are expansions set on the pad)
"2.54 针 3*2" [mil]
  rect 62x62 hole 35: 1(0,0)
  round 62 hole 35: 2(0,100) 3(100,0) 4(100,100) 5(200,0) 6(200,100)
  silkscreen extent -98,-100 298,200
3216TAC [mm]
  rect 1.6x1.65 smd: 1(0,0) 2(3,0)
  silkscreen extent -2.29,-1.3 4.3,1.3
"C SMD 0603" [mil]
  rect 25x30 smd: 1(0,0) 2(64,0)
  silkscreen extent -31,-31 95,31
"C SMD 1206" [mil]
  rect 70x60 smd: 1(0,0) 2(140,0)
  silkscreen extent -55,-50 195,50
D6.3ALC [mm]
  rect 1.6x3 smd: 1(0,0) 2(0,-5.2)
  silkscreen extent -3.57,-7.61 3.56,2.03
DB26_FEMALE_RA [mm]
  oval 1.5x1.6 hole 1: 1(0,0) 2(-2.29,0) 3(-4.58,0) 4(-6.87,0) 5(-9.16,0) 6(-11.45,0) 7(-13.74,0) 8(-16.03,0) 9(-18.32,0) 10(1.14,-2.54) 11(-1.15,-2.54) 12(-3.44,-2.54) 13(-5.73,-2.54) 14(-8.02,-2.54) 15(-10.31,-2.54) 16(-12.6,-2.54) 17(-14.89,-2.54) 18(-17.18,-2.54) 19(0,-5.08) 20(-2.29,-5.08) 21(-4.58,-5.08) 22(-6.87,-5.08) 23(-9.16,-5.08) 24(-11.45,-5.08) 25(-13.74,-5.08) 26(-16.03,-5.08)
  round 5 hole 3.5: 27(8.006,-2.54) 28(-25.314,-2.54)
  silkscreen extent -28.5,-13.97 11.19,1.5
DB44_FEMALE_RA [mm]
  oval 1.5x1.6 hole 1: 1(0,0) 2(-2.29,0) 3(-4.58,0) 4(-6.87,0) 5(-9.16,0) 6(-11.45,0) 7(-13.74,0) 8(-16.03,0) 9(-18.32,0) 10(-20.61,0) 11(-22.9,0) 12(-25.19,0) 13(-27.48,0) 14(-29.77,0) 15(-32.06,0) 16(1.14,-2.54) 17(-1.15,-2.54) 18(-3.44,-2.54) 19(-5.73,-2.54) 20(-8.02,-2.54) 21(-10.31,-2.54) 22(-12.6,-2.54) 23(-14.89,-2.54) 24(-17.18,-2.54) 25(-19.47,-2.54) 26(-21.76,-2.54) 27(-24.05,-2.54) 28(-26.34,-2.54) 29(-28.63,-2.54) 30(-30.92,-2.54) 31(0,-5.08) 32(-2.29,-5.08) 33(-4.58,-5.08) 34(-6.87,-5.08) 35(-9.16,-5.08) 36(-11.45,-5.08) 37(-13.74,-5.08) 38(-16.03,-5.08) 39(-18.32,-5.08) 40(-20.61,-5.08) 41(-22.9,-5.08) 42(-25.19,-5.08) 43(-27.48,-5.08) 44(-29.77,-5.08)
  round 5 hole 3.5: 45(-39.044,-2.54) 46(7.996,-2.54)
  silkscreen extent -42,-13.97 10.95,1.5
FFC_1.0mm_12pin_弯 [mm]
  round 1.2 hole 0.65: 1(0,0) 2(1,2) 3(2,0) 4(3,2) 5(4,0) 6(5,2) 7(6,0) 8(7,2) 9(8,0) 10(9,2) 11(10,0) 12(11,2)
  silkscreen extent -2.5,-5 13.5,3
FFC_1.0mm_18pin_弯 [mm]
  round 1.2 hole 0.65: 1(0,0) 2(1,2) 3(2,0) 4(3,2) 5(4,0) 6(5,2) 7(6,0) 8(7,2) 9(8,0) 10(9,2) 11(10,0) 12(11,2) 13(12,0) 14(13,2) 15(14,0) 16(15,2) 17(16,0) 18(17,2)
  silkscreen extent -2.5,-5 20.5,3
FFC_1.0mm_22pin_弯 [mm]
  round 1.2 hole 0.65: 1(0,0) 2(1,2) 3(2,0) 4(3,2) 5(4,0) 6(5,2) 7(6,0) 8(7,2) 9(8,0) 10(9,2) 11(10,0) 12(11,2) 13(12,0) 14(13,2) 15(14,0) 16(15,2) 17(16,0) 18(17,2) 19(18,0) 20(19,2) 21(20,0) 22(21,2)
  silkscreen extent -2.5,-5 24.5,3
HCPL062N [mm] "SOP, 8-Leads, Body 5.1x4.2mm (max), Pitch 1.27mm, IPC Medium Den"
  oval 2.35x0.7 smd: 1(0,0) 2(0,-1.27) 3(0,-2.54) 4(0,-3.81) 5(5.55,-3.81) 6(5.55,-2.54) 7(5.55,-1.27) 8(5.55,0)
  silkscreen extent -0.12,-4.45 3.98,1.12
"L SMD 1206" [mil]
  rect 70x60 smd: 1(0,0) 2(140,0)
  silkscreen extent -55,-50 195,50
"LED SMD 0805" [mil]
  rect 60x50 smd: 1(0,0) 2(90,0)
  silkscreen extent -48,-48 138,48
LQFP100_L [mm] "Thin QFP, 100-Leads, Body 14x14mm, Pitch 0.5mm, IPC High Density"
  oval 1.55x0.25 smd: 1(-7.525,6) 2(-7.525,5.5) 3(-7.525,5) 4(-7.525,4.5) 5(-7.525,4) 6(-7.525,3.5) 7(-7.525,3) 8(-7.525,2.5) 9(-7.525,2) 10(-7.525,1.5) 11(-7.525,1) 12(-7.525,0.5) 13(-7.525,0) 14(-7.525,-0.5) 15(-7.525,-1) 16(-7.525,-1.5) 17(-7.525,-2) 18(-7.525,-2.5) 19(-7.525,-3) 20(-7.525,-3.5) 21(-7.525,-4) 22(-7.525,-4.5) 23(-7.525,-5) 24(-7.525,-5.5) 25(-7.525,-6) 51(7.525,-6) 52(7.525,-5.5) 53(7.525,-5) 54(7.525,-4.5) 55(7.525,-4) 56(7.525,-3.5) 57(7.525,-3) 58(7.525,-2.5) 59(7.525,-2) 60(7.525,-1.5) 61(7.525,-1) 62(7.525,-0.5) 63(7.525,0) 64(7.525,0.5) 65(7.525,1) 66(7.525,1.5) 67(7.525,2) 68(7.525,2.5) 69(7.525,3) 70(7.525,3.5) 71(7.525,4) 72(7.525,4.5) 73(7.525,5) 74(7.525,5.5) 75(7.525,6)
  oval 0.25x1.55 smd: 26(-6,-7.525) 27(-5.5,-7.525) 28(-5,-7.525) 29(-4.5,-7.525) 30(-4,-7.525) 31(-3.5,-7.525) 32(-3,-7.525) 33(-2.5,-7.525) 34(-2,-7.525) 35(-1.5,-7.525) 36(-1,-7.525) 37(-0.5,-7.525) 38(0,-7.525) 39(0.5,-7.525) 40(1,-7.525) 41(1.5,-7.525) 42(2,-7.525) 43(2.5,-7.525) 44(3,-7.525) 45(3.5,-7.525) 46(4,-7.525) 47(4.5,-7.525) 48(5,-7.525) 49(5.5,-7.525) 50(6,-7.525) 76(6,7.525) 77(5.5,7.525) 78(5,7.525) 79(4.5,7.525) 80(4,7.525) 81(3.5,7.525) 82(3,7.525) 83(2.5,7.525) 84(2,7.525) 85(1.5,7.525) 86(1,7.525) 87(0.5,7.525) 88(0,7.525) 89(-0.5,7.525) 90(-1,7.525) 91(-1.5,7.525) 92(-2,7.525) 93(-2.5,7.525) 94(-3,7.525) 95(-3.5,7.525) 96(-4,7.525) 97(-4.5,7.525) 98(-5,7.525) 99(-5.5,7.525) 100(-6,7.525)
  silkscreen extent -7.65,-6.35 6.35,6.8, body extent -7,-7 7,7, height 1.6
"MARK点 TOP"#1 [mm]
  round 1.5 smd: 1(0,0)
  round 3 on Top Solder: 1(0,0)
"MARK点 TOP"#2 [mm]
  round 1.5 smd: 1(0,0)
  round 3 on Bottom Solder: 1(0,0)
NSO14_N [mm] "SOIC, 14-Leads, Body 8.7x3.9mm, Pitch 1.27mm, IPC Me"
  oval 2.2x0.6 smd: 1(-2.4,3.81) 2(-2.4,2.54) 3(-2.4,1.27) 4(-2.4,0) 5(-2.4,-1.27) 6(-2.4,-2.54) 7(-2.4,-3.81) 8(2.4,-3.81) 9(2.4,-2.54) 10(2.4,-1.27) 11(2.4,0) 12(2.4,1.27) 13(2.4,2.54) 14(2.4,3.81)
  silkscreen extent -2.52,-4.4 0.9,4.78, body extent -2,-4.38 2,4.38, height 1.75
NSO16_N [mm] "SOIC, 16-Leads, Body 9.9x3.9mm, Pitch 1.27mm, IPC Medium Den"
  oval 2.2x0.6 smd: 1(-2.4,4.445) 2(-2.4,3.175) 3(-2.4,1.905) 4(-2.4,0.635) 5(-2.4,-0.635) 6(-2.4,-1.905) 7(-2.4,-3.175) 8(-2.4,-4.445) 9(2.4,-4.445) 10(2.4,-3.175) 11(2.4,-1.905) 12(2.4,-0.635) 13(2.4,0.635) 14(2.4,1.905) 15(2.4,3.175) 16(2.4,4.445)
  silkscreen extent -2.52,-5 0.9,5.42, body extent -2,-5 2,5, height 1.75
"R SMD 0603" [mil]
  rect 25x30 smd: 1(0,0) 2(64,0)
  silkscreen extent -29,-31 93,31
"R SMD 0603 1%" [mil]
  rect 25x30 smd: 1(0,0) 2(64,0)
  silkscreen extent -29,-31 93,31
"R SMD 0805" [mil]
  rect 60x50 smd: 1(0,0) 2(90,0)
  silkscreen extent -48,-43 138,43
"R SMD 1206" [mil]
  rect 70x60 smd: 1(0,0) 2(140,0)
  silkscreen extent -55,-50 195,50
"R SMD 1812" [mil]
  rect 70x120 smd: 1(0,0) 2(190,0)
  silkscreen extent -55,-80 245,80
SOT23 [mm]
  rect 1x1.4 smd: 1(0,0) 2(2,0) 3(1,2.2)
  silkscreen extent -1,-1.2 3,3.4
SOT223 [mm]
  rect 1.2x2.2 smd: 1(0,0) 2(2.3,0) 3(4.6,0)
  rect 3.6x2.2 smd: 4(2.3,6.2)
  silkscreen extent -1.1,-1.6 5.7,7.8
TLP181 [mm] "SOP, 4-Leads, Body 3.8x4.4mm (max), Pitch 2.54mm, IPC Medium Den"
  oval 0.8x1.8 smd: 1(0,0) 2(2.54,0) 3(2.54,6.55) 4(0,6.55)
  silkscreen extent -1.13,-0.12 3.17,5.35
TLP281 [mm] "SOP, 4-Leads, Body 2.6x4.4mm (max), Pitch 1.27mm, IPC Medium Den"
  oval 0.6x1.8 smd: 1(0,0) 2(1.27,0) 3(1.27,6.55) 4(0,6.55)
  silkscreen extent -1.12,-0.12 2.08,5.35
TSSOP8 [mm] "Shrink Small Outline, Plastic, Thin; 8 Leads; Body Width 4.4 mm; Pitch 0.65 mm"
  rect 0.3x1.65 smd: 1(-0.975,-2.775) 2(-0.325,-2.775) 3(0.325,-2.775) 4(0.975,-2.775) 5(0.975,2.775) 6(0.325,2.775) 7(-0.325,2.775) 8(-0.975,2.775)
  silkscreen extent -1.8,-2.9 1.55,1.55
TSSOP14 [mm] "Shrink Small Outline; 14 Leads; Body Width 4.4 mm; Pitch 0."
  rect 0.3x1.65 smd: 1(-1.95,-2.775) 2(-1.3,-2.775) 3(-0.65,-2.775) 4(0,-2.775) 5(0.65,-2.775) 6(1.3,-2.775) 7(1.95,-2.775) 8(1.95,2.775) 9(1.3,2.775) 10(0.65,2.775) 11(0,2.775) 12(-0.65,2.775) 13(-1.3,2.775) 14(-1.95,2.775)
  silkscreen extent -2.77,-2.9 2.55,1.55
TSSOP20 [mm] "Shrink Small Outline; 20 Leads; Body Width 4.4 mm; Pitch 0."
  rect 0.3x1.6 smd: 1(-2.925,-2.85) 2(-2.275,-2.85) 3(-1.625,-2.85) 4(-0.975,-2.85) 5(-0.325,-2.85) 6(0.325,-2.85) 7(0.975,-2.85) 8(1.625,-2.85) 9(2.275,-2.85) 10(2.925,-2.85) 11(2.925,2.85) 12(2.275,2.85) 13(1.625,2.85) 14(0.975,2.85) 15(0.325,2.85) 16(-0.325,2.85) 17(-0.975,2.85) 18(-1.625,2.85) 19(-2.275,2.85) 20(-2.925,2.85)
  silkscreen extent -3.75,-2.97 3.3,1.65
XTAL [mm]
  rect 1.2x1.5 smd: 0(0,8.19) 0(0,-3.31)
  round 1.2 hole 0.6: 1(0,0) 2(0,4.88)
  silkscreen extent -2.5,-3.33 2.5,8.21
"安规电容 10mm间距" [mm]
  round 2.4 hole 1.2: 1(0,0) 2(10,0)
  silkscreen extent -1.5,-2.25 11.5,2.25
定位孔 [mm]
  round 0.5 hole 0.5: 1(-2.6,0) 1(-1.8,-1.8) 1(-1.8,1.8) 1(0,-2.6) 1(0,2.6) 1(1.8,-1.8) 1(1.8,1.8) 1(2.6,0)
  round 7 hole 3.5: 1(0,0)
测点 [mm]
  round 1 smd: 1(0,0)
  silkscreen extent -0.8,-0.8 0.8,0.8
"测点 地" [mm]
  round 1.7 hole 1.2: 1(0,0)
  silkscreen extent -1,-1 1,1

## Part data
C1 C2 C3 C4 C5 C6 C7 C8 C9 C10 C11 C12 C13 C14 C15 C16 C17 C18 C19 C20 C21 C24 C25 C26 C27 C28 C29 C30 C31 C32 C33 C34 C35 C36 C37 C38 C39 C40 C41 C42 C43 C44 C45 C46 C47 C48 C49 C50 C51 C52 C53 C54 C55 C56 C57 C58 C59 C60 C61 C62 C63 C64 C65: library part Cap, "Capacitor"
C22 C23 C66 C67: library part "Cap Pol1", "Polarized Capacitor (Radial)"
D12: library part LED1, "Typical RED GaAs LED"
L1 L2: library part Inductor, "Inductor"
M1 M2 M3 M4 M5 M6 M7 M8 M9 M10: library part "MARK点 TO"
P1 P2 P8: library part "Header 3X2", "Header, 3-Pin, Dual row"
P4: library part "Header 11X2", "Header, 11-Pin, Dual row"
P5: library part "Header 9X2", "Header, 9-Pin, Dual row"
P6: library part "Header 6X2", "Header, 6-Pin, Dual row"
R1 R2 R3 R4 R5 R6 R7 R8 R9 R10 R11 R12 R13 R14 R15 R16 R17 R18 R19 R20 R21 R22 R23 R24 R25 R26 R27 R28 R29 R30 R31 R32 R33 R34 R35 R36 R37 R38 R39 R40 R41 R42 R43 R44 R45 R46 R47 R48 R49 R50 R51 R52 R53 R54 R55 R56 R57 R58 R60 R61 R62 R63 R64 R65 R66 R67 R68 R69 R70 R71 R72 R73 R74 R75 R76 R77 R79 R80 R81 R82 R83 R84 R85 R86 R87 R88 R89 R90 R91 R92 R93 R94 R95 R96 R97 R98 R99 R100 R101 R102 R103 R104 R105 R106 R107 R108 R109 R110 R111 R112 R113 R114 R115 R116 R117 R118 R119 R120 R121 R122 R123 R124 R125 R126 R127 R128 R129 R130 R131 R132 R133 R134 R135 R136 R137 R138 R139 R140 R141 R142 R143 R147 R148 R149 R150 R151 R152 R153 R154 R155 R156 R157 R158 R159 R160 R161 R162 R163 R165 R166 R167 R169 R171 R172 R173 R174 R178 R179 R180 R181: library part Res2, "Resistor"
TP1 TP2 TP3 TP4 TP5 TP6 TP7 TP8 TP9 TP10 TP11 TP12 TP13 TP14 TP15 TP16 TP17 TP18 TP19 TP20 TP21 TP22 TP23 TP24 TP25 TP26 TP27 TP28 TP29 TP30 TP31 TP32 TP33 TP34 TP35 TP36 TP37 TP38 TP39 TP40: library part TEST_POINT
U4: library part TLP521-2
U7: "Quadruple Differential Line Driver"
U8 U9 U10 U11 U12 U13 U14 U15 U16 U17 U18 U19: library part TLP181/PC357
U21 U22: "Octal Buffer/Driver with 3-State Outputs"
U25: library part OPA4130PA, "Low-Power, Precision FET-Input Operational Amplifiers"
U28 U30: "Quadruple Differential Line Receiver"
Y1: "Crystal Oscillator"

## Via types
v1: diameter 26, hole 12, Top Layer to Bottom Layer, 308 vias
v2: diameter 38, hole 20, Top Layer to Bottom Layer, 32 vias

## Nets (pads, with @x,y where several pads share a name; then routed paths per layer and width w, separated by ;. In a path a pad name is that pad's centre, name@x,y a point inside that pad or via, vN(x,y) a via of type N, cw(c..) or ccw(c..) an arc to the next point about the centre after c; other vN are vias at no path point)
1V65_REF: C37.1 C40.1 C46.1 R104.1 R110.2 R118.2 U25.8 U25.9 | length 1360.4
  Top Layer w10: R104.1@3466.02,1206.66 C37.1@3466.02,1284.31 ; R104.1@3467.86,1204.81 v1(3527,1204.81) ; R118.2@3575.57,1766.97 C46.1@3575.57,1685.93 3595.5,1666 ; U25.9@3595.5,1579.8 3595.5,1666 ; U25.8@3645.5,1579.8 3645.5,1647.31 v1(3626.81,1666) 3595.5,1666 ; v1(3688.5,1484.81) 3721.04,1517.35 R110.2@3744.66,1517.35 3746.5,1515.51 C40.1@3746.5,1439.2
  Bottom Layer w10: v1(3527,1204.81) 3565,1242.81 3565,1347.81 3510.5,1402.31 3510.5,1475.81 3529,1494.31 3529,1568.19 v1(3626.81,1666) 3688.5,1604.31 v1(3688.5,1484.81)
3V3: C4.2 C5.1 C6.1 C7.1 C8.1 C9.1 C10.1 C11.1 C12.1 C13.1 C19.1 C23.1 C26.2 C51.1 D11.2 L1.1 P1.5 P2.1 P8.5 R2.2 R4.2 R5.2 R7.2 R8.2 R37.1 R39.1 R41.1 R43.1 R45.1 R47.1 R49.1 R51.1 R60.1 R61.1 R79.2 R80.2 R81.2 R82.2 R83.2 R84.2 R85.2 R93.1 TP35.1 U1.6 U1.11 U1.28 U1.50 U1.75 U1.100 U2.8 U6.14 U20.14 U23.2 U23.4 U29.14 | length 5720
  Top Layer w10: P2.1@520,981.31 452,1049.31 452,1243.89 R7.2@520,1311.89 R8.2@620,1311.89 676.92,1368.81 v1(783,1368.81) ; v1(930,1368.81) 930,1312.3 R85.2@930.41,1311.89 ; R84.2@1009.7,1312.14 v1(1009.7,1368.81) ; R83.2@1089.4,1311.98 v1(1089.4,1368.81) ; R82.2@1169.1,1311.96 v1(1169.1,1368.81) ; R81.2@1248.8,1312.12 v1(1248.8,1368.81) ; R4.2@1328.5,1428.14 1328.5,1312.27 R80.2@1328.88,1311.89 ; v1(1393,1368.81) 1393,1327.63 R79.2@1408.74,1311.89 ; v1(1417.5,2003) R60.1@1480.41,2003 ; v1(1417.5,2082) R61.1@1479.81,2082 ; v1@1486.13,1368.94 U2.8@1486.13,1432.06 ; R5.2@1544.58,1843.81 v1(1599,1843.81) ; U1.75@1927.74,1176.09 1981.28,1176.09 v1(2001,1195.81) ; v1(1974.5,1784.31) 1987.78,1771.04 U1.50@1987.78,1708.57 ; v1(2381,1610.31) 2420.85,1650.17 U1.28@2420.85,1708.57 ; v1@2431.63,1372.94 U1.11@2520.26,1372.94 ; v1@2460.22,1019.81 U1.100@2460.22,1116.06 ; U1.6@2520.26,1274.52 v1(2601,1274.52) ; v1(4248.5,863.81) U6.14@4248.5,925.74 ; U20.14@4340.52,2145.81 v1(4397.5,2145.81) ; U29.14@4658.37,926.02 4658.37,874.95 4680,853.31 4717.5,853.31 4740,875.81 v1(4740,924.81) ; R93.1@5054.09,1949.93 C26.2@5054.09,2044.89
  Top Layer w30: U23.2@4914,2044.87 C26.2@5054.09,2044.89
  Bottom Layer w10: D11.2@1272.24,689.81 1320,737.57 v1(1320,772.81) ; v1(1486,1368.81) 1505,1387.81 C12.1@1505,1430.31 ; C8.1@1952.5,1195.81 v1(2001,1195.81) ; v1(1974.5,1784.31) 1974.5,1734.81 C11.1@1975,1734.31 ; R2.2@2303.5,1372.81 v1(2431.5,1372.81) ; C4.2@2335,1577.16 2335,1593.81 2351.5,1610.31 v1(2381,1610.31) 2405,1610.31 L1.1@2459,1664.31 2496,1701.31 v1(2496,1793.31) ; C9.1@2376.5,1019.81 v1(2460,1019.81) ; C10.1@2557,1308.31 2594,1308.31 2601,1301.31 v1(2601,1274.52) ; v1(4248.5,863.81) C13.1@4248.5,941.81 ; v1(4397.5,2145.81) 4584.5,2145.81 ; v1(4740,924.81) C51.1@4740,1004.31
  Bottom Layer w20: v1(1320,817.81) v1(1320,772.81) 1365,772.81 1447.5,690.31 R51.1@2758,690.31
  Bottom Layer w26: v1(2068,1295.31) 2089.5,1316.81 v1(2089.5,1327.81) C5.1@2089.5,1383.81 ; C6.1@2114,1251.31 C6.1@2131,1234.31 2170.5,1273.81 v1(2170.5,1310.81) 2153.5,1327.81 v1(2131.25,1327.81)
  Bottom Layer w30: 4827.5,2040.31 C23.1@5077.74,2040.31
  other v1: 701,1368.81 1328.5,1368.81 1783.5,1707.81 4545.5,1806.81 4598,1806.81 4650.5,1806.81 4703,1806.81 4755.5,1806.81 4545.5,1844.31 4598,1844.31 4650.5,1844.31 4703,1844.31 4755.5,1844.31 4545.5,1881.81 4598,1881.81 4650.5,1881.81 4703,1881.81 4755.5,1881.81
3V3A: C27.2 C28.2 L1.2 R94.1 TP21.1 U1.22 | length 674.6
  Top Layer w10: U1.22@2520.26,1589.48 v1(2700,1589.48) TP21.1@2756,1589.48 ; R94.1@3044.5,1605.31 v1(3096.5,1605.31)
  Bottom Layer w10: C28.2@2564,1451.31 2599,1486.31 C27.2@2599,1548.31
  Bottom Layer w20: L1.2@2599,1664.31 C27.2@2599,1548.31 2658.84,1548.31 v1(2700,1589.48) v1(2700,1630.81)
3V_REF: C29.2 C30.2 C41.2 R94.2 R96.1 R111.2 TP20.1 U1.21 U3.1 | length 1934.9
  Top Layer w10: U1.21@2520.26,1569.8 2672.52,1569.8 2696.5,1545.81 2816.5,1545.81 TP20.1@2837,1566.31 2837,1608.31 v1(2811.5,1633.81) 2811.5,1655.81 2840,1684.31 U3.1@2888.5,1684.31 R96.1@2980.5,1684.31 R94.2@2980.5,1605.31 ; v1(3688.5,1673.81) R111.2@3744.5,1673.81 ; R111.2@3744.66,1673.66 C41.2@3744.66,1749.97
  Bottom Layer w10: C30.2@2903,1603.31 2842,1603.31 v1(2811.5,1633.81) 2811.5,1694.81 2830,1713.31 C29.2@2874,1713.31 2937.5,1649.81 3450,1649.81 3500,1699.81 3662.5,1699.81 v1(3688.5,1673.81)